# EAGLE board kwpa_ldmos2 (EAGLE 7.7.0)
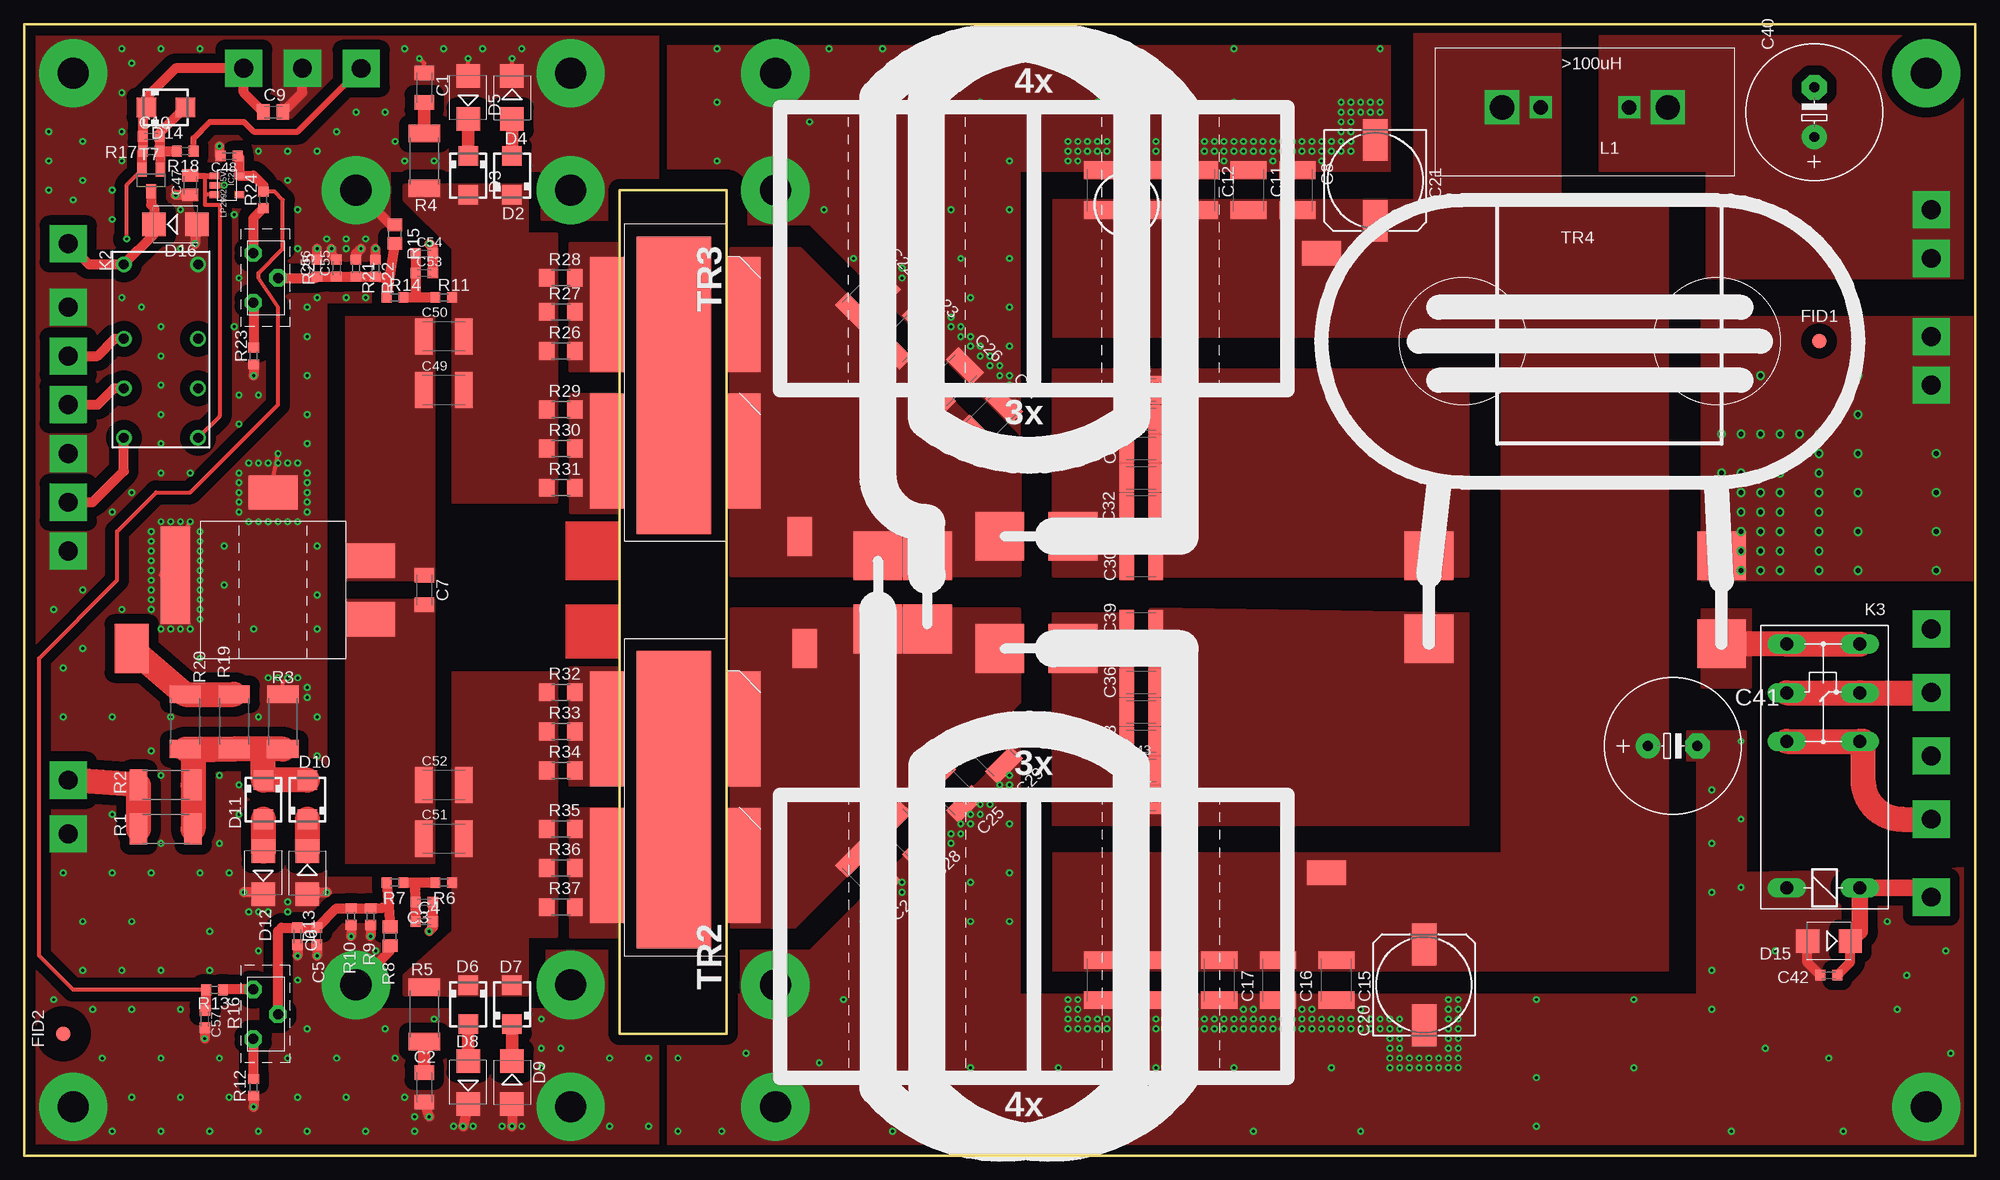
[diagram p0: board, top side]
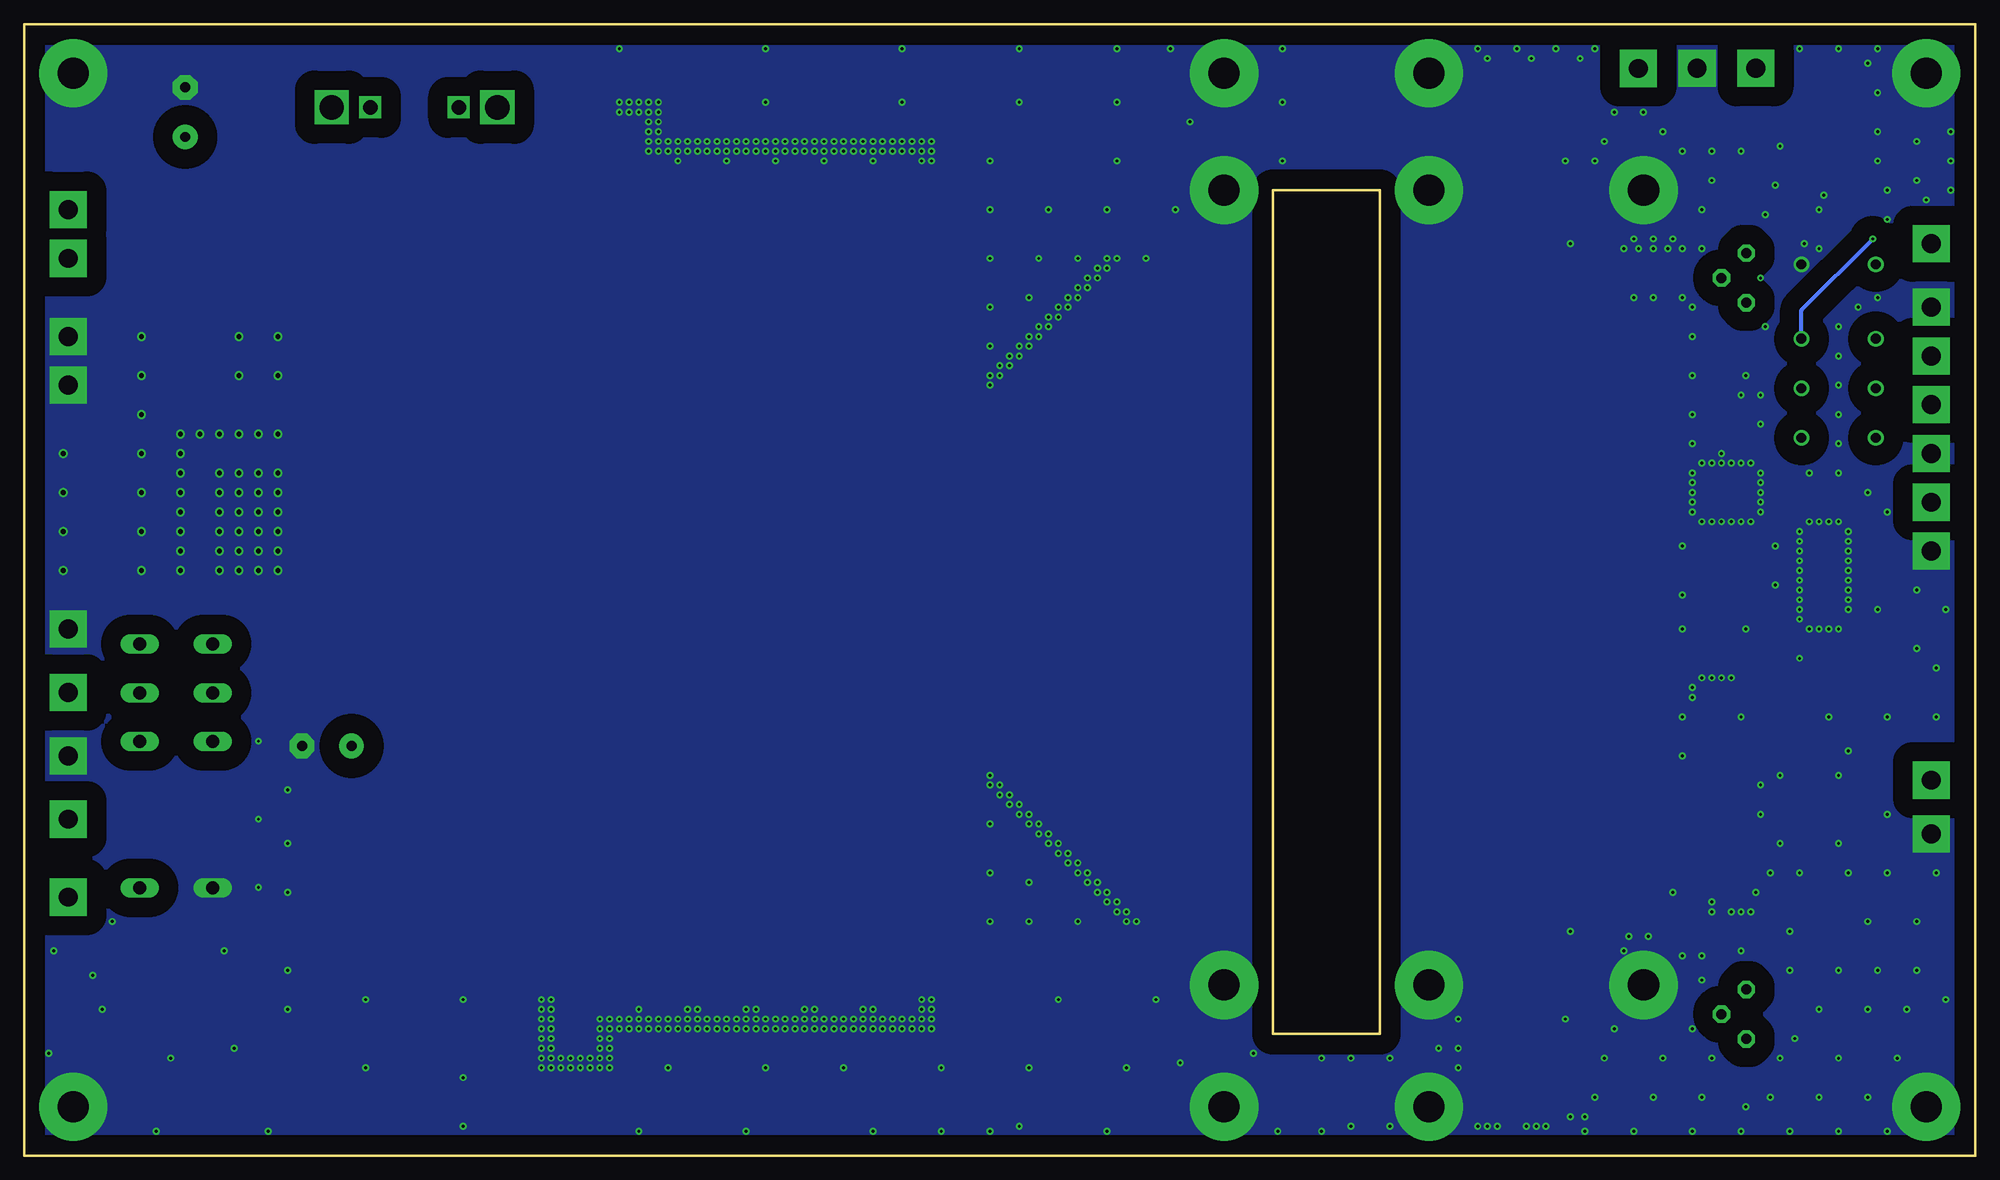
[diagram p1: board, bottom side, seen from below]

Size 200 x 116 mm. Coordinates in mm from the lower left corner, seen from the top.
Outline: 61,99 61,12.5 72,12.5 72,99 61,99
Outline: 0,0 200,0 200,116 0,116 0,0
Copper layers (1*16): Top 0.035mm / dielectric 1.5mm / Bottom 0.035mm
Design rules "default *": minimum track width 10mil, minimum drill 0.3mm, track to track 8mil, track to pad 8mil, pad to pad 8mil, via to via 8mil, smd to smd 0mil, copper to edge 2mil, drill to drill 8mil, minimum pad ring 10mil, minimum via ring 8mil, stop-mask expansion 4mil, vias tented up to drill 0.51mm, thermal gap 10mil

## Footprints (pad centres in the part's own frame; a part is rotated, then mirrored left to right if it is on the bottom)
C1206K = smd 1.5 x 2: 1 -1.5,0; 2 1.5,0
C0603K = smd 1.05 x 1.08: 1 -0.875,0; 2 0.875,0
C1812K = smd 1.8 x 3.7: 1 -2.05,0; 2 2.05,0
C0805K = smd 1.3 x 1.6: 1 -1,0; 2 1,0
153CLV-1014 = smd 4.3 x 2.5: + 4.15,0; - -4.15,0
C1210K = smd 1.5 x 2.9: 1 -1.5,0; 2 1.5,0
E5-13 = drill 1.016 pad 2.54: + -2.54,0 | drill 1.016 pad 2.54 octagon: - 2.54,0
SMA = smd 2 x 2: A 2,0; C -2,0
SMB = smd 2.4 x 2.4: A 2.2,0; C -2.2,0
FIDUCIAL = smd 1.5 x 1.5: P$1 0,0
HOLE32 = drill 3.2 pad 7: P$1 0,0
SOT23-5 = smd 0.686 x 0.991: 1 -0.953,0; 2 0,0; 3 0.953,0; 4 0.953,2.54; 5 -0.953,2.54
THICKPIN = drill 1.93 pad 3.81 square: 1 0,0
FINDER-30.22 = drill 1 pad 1.6: 11 -1.27,-3.81; 12 3.81,-3.81; 14 8.89,-3.81; 21 -1.27,3.81; 22 3.81,3.81; 24 8.89,3.81; A1 -8.89,-3.81; A2 -8.89,3.81
G2RE = drill 1.321 long: 1 -2.54,-3.683; 2 -2.54,3.81; O0 12.471,-3.683; O1 12.471,3.81; P0 17.45,-3.683; P1 17.45,3.81; S0 22.454,-3.683; S1 22.454,3.81
KERN90_STEHEND_2PIN = drill 1.5 square: P$1 -4.54,0; P$2 4.54,0
R2512 = smd 1.8 x 3.2: 1 -2.8,0; 2 2.8,0
R0603 = smd 1 x 1.1: 1 -0.85,0; 2 0.85,0
R0805 = smd 1.3 x 1.5: 1 -0.95,0; 2 0.95,0
MINIPOTI = drill 1.016 pad 1.778 octagon: 1 -2.54,-2.54; 2 2.54,-2.54; 3 0,0
R1206 = smd 1.6 x 1.803: 1 -1.422,0; 2 1.422,0
BLF188 = smd 11.8 x 3.5: 1 9.25,12.25; 2 23.25,12.25; 3 9.25,-1.75; 4 23.25,-1.75 | smd 30.48 x 7.62: PAD 16.51,5.08
SMDPAD2,5X4 = smd 4 x 2.5: P$1 0,0
SOT23 = smd 1 x 1.4: 1 -0.95,-1.1; 2 0.95,-1.1; 3 0,1.1
KW-INPUT_LAIRD_28B0562-100 = smd 10 x 3: COM 8.5,17.5 | smd 3.5 x 5: GND 17,7.5; OUT1 4,-2.5; OUT2 10,-2.5 | smd 5 x 3.5: IN 1,22
DOPPELRINGKERN = smd 5 x 5: P1 10,53.5; P2 22.5,44; S1 10,46; S2 30,44
DOPPELRINGKERN_REV = smd 5 x 5: P1 15.08,-53.5; P2 22.5,-44; S1 15.08,-46; S2 30,-44
DOPPELLMANTEL_STEHEND = smd 5 x 5: P1 45.5,40.5; P2 45,10.5; S1 36.5,40.5; S2 36.5,10.5

## Placement (x,y rotation side)
C1  10n/450V  [C1206K]  41,109.5 270 top
C2  10n/450V  [C1206K]  41,7 270 top
C3  1u  [C0603K]  41,26 0 top
C4  100n  [C0603K]  41,24 0 top
C5  1u  [C0603K]  30,22.5 270 top
C6  10n  [C0603K]  28,22.5 270 top
C7  opt.  [C1206K]  41,58 270 top
C8  10n  [C1812K]  130.5,99 90 top
C9  10u/25  [C0805K]  25.5,107 0 top
C10  10n  [C0603K]  13,104.5 0 top
C11  10n  [C1812K]  125.5,99 90 top
C12  100n  [C1812K]  120.5,99 90 top
C13  100n  [C1812K]  115.5,99 90 top
C14  1u  [C1812K]  110.5,99 90 top
C15  10n  [C1812K]  134.5,18 90 top
C16  10n  [C1812K]  128.5,18 90 top
C17  100n  [C1812K]  122.5,18 90 top
C18  100n  [C1812K]  116.5,18 90 top
C19  1u  [C1812K]  110.5,18 90 top
C20  100u/63  [153CLV-1014]  143.5,17.5 90 top
C21  100u/63  [153CLV-1014]  138.5,100 270 top
C22  120p  [C1812K]  86.5,88 225 top
C23  120p  [C1812K]  90.5,84 225 top
C24  120p  [C1812K]  86.5,29 135 top
C25  120p  [C1812K]  95,37.5 135 top
C26  120p  [C1812K]  95,79.5 225 top
C27  120p  [C1812K]  99,75.5 225 top
C28  120p  [C1812K]  90.5,33 135 top
C29  120p  [C1812K]  99,41.5 135 top
C30  10n  [C1210K]  114.5,60.5 0 top
C31  10n  [C1210K]  114.5,63.5 0 top
C32  10n  [C1210K]  114.5,66.5 0 top
C33  10n  [C1210K]  114.5,69.5 0 top
C34  10n  [C1210K]  114.5,72.5 0 top
C35  10n  [C1210K]  114.5,51.5 0 top
C36  10n  [C1210K]  114.5,48.5 0 top
C37  10n  [C1210K]  114.5,45.5 0 top
C38  10n  [C1210K]  114.5,42.5 0 top
C39  10n  [C1210K]  114.5,54.5 0 top
C40  470uF/63V  [E5-13]  183.5,107 90 top
C41  470uF/63V  [E5-13]  169,42 0 top
C42  100n  [C0603K]  185,18.5 0 top
C43  10n  [C1210K]  114.5,39.5 0 top
C44  10n  [C1210K]  114.5,36.5 0 top
C45  10n  [C1210K]  114.5,75.5 0 top
C46  10n  [C1210K]  114.5,78.5 0 top
C47  10u  [C0805K]  17,99.5 90 top
C48  10u  [C0603K]  21,102.5 180 top
C49  100n  [C1812K]  43,78.5 0 top
C50  100n  [C1812K]  43,84 0 top
C51  100n  [C1812K]  43,32.5 0 top
C52  100n  [C1812K]  43,38 0 top
C53  1u  [C0603K]  41,90.5 0 top
C54  100n  [C0603K]  41,92.5 0 top
C55  1u  [C0603K]  32,91 90 top
C56  10n  [C0603K]  30,91 90 top
C57  1u  [C0603K]  18.5,14 270 top
D2  8,2V  [SMA]  50,100.5 90 top
D3  4,7V  [SMA]  45.5,100.5 270 top
D4  DIODE SMB  [SMB]  50,108.5 270 top
D5  DIODE SMB  [SMB]  45.5,108.5 90 top
D6  8,2V  [SMA]  45.5,15.5 270 top
D7  4,7V  [SMA]  50,15.5 90 top
D8  DIODE SMB  [SMB]  45.5,7.5 90 top
D9  DIODE SMB  [SMB]  50,7.5 270 top
D10  SMBJ15A  [SMA]  29,36.5 90 top
D11  SMBJ15A  [SMA]  24.5,36.5 270 top
D12  DIODE SMB  [SMB]  24.5,29 90 top
D13  DIODE SMB  [SMB]  29,29 270 top
D14  6,2V/1W  [SMA]  14.5,107.5 0 top
D15  DIODE SMB  [SMB]  185,22 180 top
D16  DIODE SMB  [SMB]  15.5,95.5 0 top
FID1  FIDUCIAL  [FIDUCIAL]  184,83.5 0 top
FID2  FIDUCIAL  [FIDUCIAL]  4,12.5 0 top
H1  HOLE_32  [HOLE32]  5,111 0 top
H2  HOLE_32  [HOLE32]  5,5 0 top
H3  HOLE_32  [HOLE32]  195,111 0 top
H4  HOLE_32  [HOLE32]  195,5 0 top
H5  HOLE_32  [HOLE32]  77,99 0 top
H6  HOLE_32  [HOLE32]  56,5 90 top
H7  HOLE_32  [HOLE32]  56,111 90 top
H8  HOLE_32  [HOLE32]  34,17.5 90 top
H9  HOLE_32  [HOLE32]  56,17.5 90 top
H10  HOLE_32  [HOLE32]  77,17.5 90 top
H11  HOLE_32  [HOLE32]  34,99 90 top
H12  HOLE_32  [HOLE32]  56,99 90 top
H13  HOLE_32  [HOLE32]  77,111 0 top
H14  HOLE_32  [HOLE32]  77,5 0 top
IC2  LP2992 - 5V  [SOT23-5]  19.5,99.5 270 top
JP1  RF_IN  [THICKPIN]  4.5,82 0 top
JP2  GND  [THICKPIN]  4.5,87 0 top
JP3  GND  [THICKPIN]  195.5,41 90 top
JP4  RXBYP-2  [THICKPIN]  195.5,34.5 90 top
JP5  +12..+14V  [THICKPIN]  22.5,111.5 90 top
JP7  RX_BYP1  [THICKPIN]  4.5,77 0 top
JP8  GND  [THICKPIN]  4.5,72 0 top
JP9  PTT  [THICKPIN]  34.52,111.48 90 top
JP10  GND  [THICKPIN]  28.5,111.5 90 top
JP11  RF-OUT  [THICKPIN]  195.5,47.5 90 top
JP12  GND  [THICKPIN]  195.5,54 90 top
JP13  +50V  [THICKPIN]  195.5,97 0 top
JP14  GND  [THICKPIN]  195.5,84 0 top
JP15  GND  [THICKPIN]  195.5,79 0 top
JP16  +50V  [THICKPIN]  195.5,92 0 top
JP17  RELAIS  [THICKPIN]  4.5,93.5 0 top
JP18  RELAIS  [THICKPIN]  195.5,26.5 0 top
JP19  TO_ATT  [THICKPIN]  4.5,67 0 top
JP20  GND  [THICKPIN]  4.5,62 0 top
JP21  FROM_ATT  [THICKPIN]  4.5,38.5 0 top
JP22  GND  [THICKPIN]  4.5,33 0 top
K2  FINDER-30.22  [FINDER-30.22]  14,82.5 270 top
K3  G5RL-1E-HR-12V  [G2RE]  184.5,30 90 top
L1  >100uH  [KERN90_STEHEND_2PIN]  160,107.5 180 top
R1  22/2W  [R2512]  14.5,33.5 0 top
R2  22/2W  [R2512]  14.5,38 0 top
R3  100/2W  [R2512]  26.5,44.5 270 top
R4  10/2W  [R2512]  41,102 90 top
R5  10/2W  [R2512]  41,14.5 90 top
R6  1k  [R0603]  43,28 0 top
R7  470  [R0603]  38,28 0 top
R8  NTC0805J5K0  [R0805]  37.5,22.5 90 top
R9  560  [R0603]  35.5,24.5 90 top
R10  5k6  [R0603]  33.5,24.5 90 top
R11  1k  [R0603]  43,88 0 top
R12  47  [R0603]  23.5,7 90 top
R13  270  [R0603]  19.5,17 180 top
R14  470  [R0603]  38,88 0 top
R15  NTC0805J5K0  [R0805]  38,94.5 270 top
R16  250  [MINIPOTI]  26,14.5 270 top
R17  10k  [R0603]  13,103 0 top
R18  10k  [R0603]  16.5,103 180 top
R19  22/2W  [R2512]  21.5,44.5 90 top
R20  22/2W  [R2512]  16.5,44.5 90 top
R21  560  [R0603]  34,91 270 top
R22  5k6  [R0603]  36,91 270 top
R23  47  [R0603]  23.5,82 90 top
R24  270  [R0603]  24.5,98 90 top
R25  250  [MINIPOTI]  26,90 270 top
R26  10  [R1206]  55,82.5 0 top
R27  10  [R1206]  55,86.5 0 top
R28  10  [R1206]  55,90 0 top
R29  10  [R1206]  55,76.5 0 top
R30  10  [R1206]  55,72.5 0 top
R31  10  [R1206]  55,68.5 0 top
R32  10  [R1206]  55,47.5 0 top
R33  10  [R1206]  55,43.5 0 top
R34  10  [R1206]  55,39.5 0 top
R35  10  [R1206]  55,33.5 0 top
R36  10  [R1206]  55,29.5 0 top
R37  10  [R1206]  55,25.5 0 top
T1  BLF188  [BLF188]  61.5,53 270 top
T1P3  [SMDPAD2,5X4]  133,92.5 180 top
T1P4  [SMDPAD2,5X4]  79.5,63.5 90 top
T1S3  [SMDPAD2,5X4]  80,52 90 top
T1S4  [SMDPAD2,5X4]  133.5,29 0 top
T2  BLF188  [BLF188]  61.5,95.5 270 top
T7  IRLML6401  [SOT23]  13,100 180 top
TR1  4:1 Laird 28B0562-100  [KW-INPUT_LAIRD_28B0562-100]  33,51 90 top
TR2  [DOPPELRINGKERN]  77.5,8 0 top
TR3  [DOPPELRINGKERN_REV]  77.5,107.5 0 top
TR4  [DOPPELLMANTEL_STEHEND]  133.5,98 270 top

## Library data of the parts
C1-C57 R1-R15 R17-R24 R26-R37 = rcl
D2 D3 D6 D7 D10 D11 D14 FID1 FID2 H1-H14 IC2 JP1-JP5 JP7-JP22 R16 R25 T1P3 T1P4 T1S3 T1S4 = km
D4 D5 D8 D9 D12 D13 D15 D16 = diode
K2 K3 = relay; OC_FARNELL: unknown; OC_NEWARK: unknown
L1 T1 T2 TR1-TR4 = km_HF
T7 = transistor-small-signal

## Nets
ATTM: D10.A D11.C R1.2 R2.2 R3.2 R19.1 R20.1
BYP: IC2.4
BYP1: JP7.1 K2.12
DD1: C49.2 C50.2 D2.C D3.A R4.1 R11.2 R26.1 R27.1 R28.1 R29.1 R30.1 R31.1
DD2: C51.2 C52.2 D6.C D7.A R5.2 R6.2 R32.1 R33.1 R34.1 R35.1 R36.1 R37.1
DI1: C7.1 C49.1 C50.1 TR1.OUT2
DI2: C7.2 C51.1 C52.1 TR1.OUT1
DRAIN1: C22.2 C23.2 C26.2 C27.2 T1P4.P$1 T2.1 T2.2 TR2.P1 TR3.P2 TR3.S1
DRAIN2: C24.2 C25.2 C28.2 C29.2 T1.1 T1.2 T1S3.P$1 TR2.P2 TR2.S1 TR3.P1
G1: R26.2 R27.2 R28.2 T2.3
G2: R29.2 R30.2 R31.2 T2.4
G3: R32.2 R33.2 R34.2 T1.3
G4: R35.2 R36.2 R37.2 T1.4
GND: C1.1 C2.2 C3.2 C4.2 C5.2 C6.2 C8.2 C9.2 C11.2 C12.2 C13.2 C14.2 C15.1 C16.1 C17.1 C18.1 C19.1 C20.- C21.- C22.1 C23.1 C24.1 C25.1 C26.1 C27.1 C28.1 C29.1 C40.- C41.- C42.1 C47.1 C48.2 C53.2 C54.2 C55.2 C56.2 C57.2 D4.C D5.A D8.C D9.A D12.C D13.A D15.A D16.A H1.P$1 H2.P$1 H3.P$1 H4.P$1 H5.P$1 H6.P$1 H7.P$1 H8.P$1 H9.P$1 H10.P$1 H11.P$1 H12.P$1 H13.P$1 H14.P$1 IC2.2 JP2.1 JP3.1 JP8.1 JP10.1 JP12.1 JP14.1 JP15.1 JP20.1 JP22.1 K2.A2 K3.2 R3.1 R8.1 R9.1 R10.1 R12.1 R15.1 R21.1 R22.1 R23.1 TR1.COM TR1.GND TR4.S1
N$1: JP21.1 R1.1 R2.1
N$2: C47.2 IC2.1 IC2.3 K2.24
N$3: D10.C D13.C
N$4: JP11.1 K3.P0 K3.P1
N$5: C1.2 R4.2
N$6: C2.1 R5.1
N$7: JP19.1 K2.14
N$8: C3.1 C4.1 R6.1 R7.2
N$9: C5.1 C6.1 R7.1 R8.2 R9.2 R10.2 R16.3
N$10: T1.PAD
N$12: R12.2 R16.2
N$13: R13.1 R16.1
N$14: C48.1 C57.1 IC2.5 R13.2 R24.2
N$15: D3.C D5.C
N$16: D2.A D4.A
N$17: C53.1 C54.1 R11.1 R14.2
N$18: D7.C D9.C
N$19: D6.A D8.A
N$20: D11.A D12.A
N$21: C55.1 C56.1 R14.1 R15.2 R21.2 R22.2 R25.3
N$22: R23.2 R25.2
N$23: R24.1 R25.1
N$26: T2.PAD
N$28: C10.2 D14.A R17.2 R18.2 T7.1
N$29: JP4.1 K3.O0 K3.O1
N$33: JP9.1 R18.1
N$34: R19.2 R20.2 TR1.IN
OUTP1: C30.1 C31.1 C32.1 C33.1 C34.1 C45.1 C46.1 TR3.S2
OUTP2: C35.1 C36.1 C37.1 C38.1 C39.1 C43.1 C44.1 TR2.S2
OUTR1: K3.S0 K3.S1 TR4.P1
OUTS1: C30.2 C31.2 C32.2 C33.2 C34.2 C45.2 C46.2 TR4.S2
OUTS2: C35.2 C36.2 C37.2 C38.2 C39.2 C43.2 C44.2 TR4.P2
RELAIS: C42.2 D15.C JP18.1 K3.1
RELAISOUT: D16.C JP17.1 K2.A1 T7.3
RFIN: JP1.1 K2.11
U12: C9.1 C10.1 D14.C JP5.1 K2.21 R17.1 T7.2
UIN: C40.+ JP13.1 JP16.1 L1.P$1
UVERS: C8.1 C11.1 C12.1 C13.1 C14.1 C15.2 C16.2 C17.2 C18.2 C19.2 C20.+ C21.+ C41.+ L1.P$2 T1P3.P$1 T1S4.P$1

## Tracks (layer width: path | path; a pad name or v marks a point on that pad's centre or on a via)
ATTM
  Top 2.54: R3.2 24.5,41.7 | 24.5,41.7 R19.1 | R20.1 R19.1 | R19.1 17.5,41.5 17.3,41.5 R2.2 R1.2 | D10.A D11.C 24.5,41.7
BYP1
  Top 1.016: JP7.1 7.5,77 9.19,78.69 K2.12
DD1
  pour Top (no thermals): 54.5,67 44,67 44,93 39,98 39,99.5 51.5,99.5 51.5,94.5 54.5,94.5
DD2
  pour Top (no thermals): 54.5,49.5 54.5,22.5 51.5,22.5 51.5,16.5 39,16.5 39,18.5 44,23 44,49.5
DI1
  pour Top (no thermals): 42,59 42,86 37,86 33,86 33,59
DI2
  pour Top (no thermals): 42,57 33,57 33,34 33,30 42,30
DRAIN1
  pour Top (no thermals): 72.5,93 79.5,93 102,70.5 102,59.5 72.5,59.5
DRAIN2
  pour Top (no thermals): 72.5,23.5 79,23.5 102,46.5 102,56 72.5,56
G1
  pour Top (no thermals): 61,80.5 56,80.5 56,93.5 61,93.5
G2
  pour Top (no thermals): 61,78 56,78 56,66 61,66
G3
  pour Top (no thermals): 61,38 56,38 56,50 61,50
G4
  pour Top (no thermals): 61,35.5 56,35.5 56,22.5 61,22.5
GND  (via drill 0.3, 0.5)
  Top 0.406: TR1.GND 25.5,69.5 v26,72 | C1.1 41,112 v40.5,112.5 | D5.A v45.5,112.5 | D4.C v50,112.5 | TR1.COM 14,59.5 v17,65 | R3.1 26.5,48.5 v27,49
  Top 0.61: IC2.2 v20.5,99.5
  Top 1.016: C42.1 182.8,19.82 D15.A | C9.2 28.5,109 JP10.1 | C48.2 20,102.62 v20,103.5 | C47.1 v15.5,98.5 | D16.A 17.5,95.3 v17.5,93.5 | R23.1 v23.5,80 | C56.2 v30,93 | C55.2 31.5,92.38 v31.5,93 | R21.1 34,92.5 v34.5,93 | R22.1 v36,93 | R15.1 37.55,95.45 H11.P$1 | v41.5,93.5 41.88,93.12 C54.2 C53.2 | C3.2 C4.2 41.88,23.38 v41.5,23 | R9.1 v35.5,22.5 | R8.1 37.5,21 H8.P$1 | R10.1 v33.5,22.5 | C5.2 v30,20.5 | C6.2 v28,20.5 | R12.1 v23.5,5 | D12.C 24.3,27 v22.5,27 | D13.A 29.2,27 v31,27 | C2.2 v41.5,4 | D8.C v45,3 | D9.A v50,3 | C57.2 v18.5,12
  other vias: 101,92 88,92 89,91 90,90 91,89 92,88 93,87 94,86 95,85 96,84 97,83 98,82 99,81 100,80 101,79 101,80 99,82 98,83 94,87 93,88 90,91 89,92 85,92 96,92 101,87 97,88 101,83 92,92 91,90 92,89 95,86 96,85 97,84 100,81 101,24 101,39 100,38 99,37 98,36 97,35 96,34 95,33 94,32 93,31 92,30 91,29 90,28 89,27 88,26 87,25 86,24 87,24 88,25 89,26 90,27 91,28 92,29 93,30 94,31 95,32 96,33 97,34 98,35 99,36 100,37 101,38 101,34 101,29 97,24 92,24 97,28 108,103 109,103 110,103 111,103 112,103 113,103 114,103 115,103 116,103 117,103 118,103 119,103 120,103 121,103 122,103 123,103 124,103 125,103 126,103 127,103 128,103 129,103 130,103 131,103 132,103 133,103 134,103 135,103 136,103 136,104 136,105 136,106 136,107 137,107 138,107 139,107 108,102 113,102 118,102 123,102 128,102 133,102 107,102 107,103 107,104 108,104 109,104 110,104 111,104 112,104 113,104 114,104 115,104 116,104 117,104 118,104 119,104 120,104 121,104 122,104 123,104 124,104 125,104 126,104 127,104 128,104 129,104 130,104 131,104 132,104 133,104 134,104 135,104 135,105 135,106 135,107 135,108 136,108 137,108 138,108 139,108 139,113.5 124,113.5 110,113.5 98,113.5 88,113.5 82.5,113.5 71,113.5 71,108 71,102 82,97 89,97 95,97 101,97 101,102 80.5,106 88,108 98,108 110,108 124,108 88,102 174,74 176,74 178,74 180,74 182,74 184,74 184,72 184,70 184,68 184,66 184,64 184,62 184,60 174,84 178,84 174,80 178,80 188,84 188,80 188,76 188,72 188,68 188,64 188,60 196,60 196,64 196,68 196,72 174,70 174,66 174,62 176,60 180,60 180,62 180,66 180,70 178,70 176,70 176,66 178,66 178,62 174,68 176,68 178,68 180,68 180,64 178,64 176,64 174,64 174,60 176,62 178,60 108,16 108,15 108,14 109,14 107,16 107,15 107,14 107,13 108,13 109,13 110,14 111,14 112,14 113,14 114,14 115,14 116,14 117,14 118,14 119,14 120,14 121,14 122,14 123,14 124,14 125,14 126,14 127,14 128,14 129,14 130,14 131,14 132,14 133,14 134,14 135,14 136,14 137,14 138,14 139,14 140,14 141,14 141,13 141,12 141,11 141,10 142,10 143,10 144,10 145,10 146,10 146,11 146,12 146,13 146,14 146,15 146,16 137,15 132,15 131,15 126,15 125,15 120,15 119,15 114,15 113,15 110,13 111,13 112,13 113,13 114,13 115,13 116,13 117,13 118,13 119,13 120,13 121,13 122,13 123,13 124,13 125,13 126,13 127,13 128,13 129,13 130,13 131,13 132,13 133,13 134,13 135,13 136,13 137,13 138,13 139,13 140,13 140,12 140,11 140,10 140,9 141,9 142,9 143,9 144,9 145,9 146,9 147,9 147,10 147,11 147,12 147,13 147,14 147,15 147,16 67,10 67,2.5 71.5,2.5 89,2.5 98,3 101,2.5 106,2.5 113,2.5 126,2.5 137,2.5 84,16 94,16 74,10.5 81.5,9.5 87,9 97,9 106,9 116,9 124,9 134,9 155,16 165,16 173,15 173,19 173,27 197,21 197.5,10.5 186.5,2.5 175,2.5 155,3 155,8 165,9 185,10 192,15 191,24 33,93 10,113.5 14,113.5 18,113.5 39,113.5 43,113.5 47,113.5 51,113.5 11,112 10,109 2.5,105 2.5,102 2.5,99 5,98 9,96 9,99 10,102 10,105 6,104 6,100 24,103 27,103 30,103 32,105 34,107 37,107 38,104 39,102 42,102 27,100 28,97 28,93 31,94 33,94 35,94 16,97 16,93 10,88 12,87 14,85 14,82 14,79 14,76 14,73 14,70 11,68 9,66 3,56 6,58 22,75 22,78 24,78 17,70 35,88 33,88 30,88 29,87 29,84 29,80 29,76 29,73 29,70 29,69 29,68 29,67 29,66 28,65 27,65 26,65 25,65 24,65 23,65 22,66 22,67 22,68 22,69 22,70 23,71 24,71 25,71 26,71 27,71 28,71 16,65 15,65 14,65 13,64 13,63 13,62 13,61 13,60 13,59 13,58 13,57 13,56 14,54 15,54 16,54 17,54 18,55 18,56 18,57 18,58 18,59 18,60 18,61 18,62 18,63 18,64 25,49 26,49 28,49 30,41 30,45 29,47 29,48 30,57.5 23.5,54 18,51 24,45 15,45 4,45 9,45 6,52 10,56 13,41.5 14,32 14,39 20,39 22,38 22,35 20,32 21,29 18,29 13,29 9,29 4,29 9,35 4,50 3,16 7,15 11,15 16,15 8,10 14,10 20,10 11,6 16,6 21,6 9,2.5 14,2.5 19,2.5 24,2.5 29,2.5 35,2.5 40,2.5 28,6 33,6 39,6 27,10 32,10 38,10 29,13 37,13 42,14 28,18 36,21 6,19 10,19 14,19 19,19 24,21 23,25 24,25 25,25 27,26 27,25 19,23 6,24 11,24 64,3 64,10 60,10 60,3 53,14 53,11 53,9 55,11 40,4 44,3 46,3 49,3 51,3 173,32 173,37.5 176,42.5 176,34.5 176,27.5 179.5,21 193,18.5 178.5,11 21.5,96.5 22,90 21.5,85 30,54 30,62.5 20.5,62.5 20.5,58.5
  pour Bottom (isolate 2, no thermals): -5.5,116.75 200.25,116.75 199.75,-0.25 -6,-0.25
  pour Top (isolate 1, no thermals): 171.5,16.5 171.5,40.5 170.5,40.5 170.5,43.5 176.5,43.5 176.5,29 200.5,29.5 200.5,0 66,0 66,16.5 73.5,16.5 73.5,21 80.5,21 102,42.5 102,16.5
  pour Top (isolate 2, no thermals): 140,101 140,117 66,117 66,100.5 73.5,100.5 73.5,95.5 80.5,95.5 102,74 102,101
  pour Top (no thermals): 200,86 200,59 172,59 172,86
  pour Top (isolate 1.016, no thermals): -0.5,116 -0.5,0 65,0 65,21 53.5,21 53.5,15 36.5,15 36.5,28.5 31,28.5 31,87.5 37.5,87.5 37.5,101 53,101 53,96 65,96 65,116
N$1
  Top 2.54: R1.1 R2.1 JP21.1
N$2
  Top 0.203: 18.5,100.46 18.51,100.47
  Top 0.406: 18.5,100.46 18.5,98.5 | 18.5,98.5 18.5,97.5 20,97.5 20,75.8 K2.24 | IC2.3 18.55,98.55 18.5,98.5
  Top 0.61: C47.2 18.51,100.47 IC2.1
N$3
  Top 2.54: D10.C D13.C
N$4
  Top 2.54: K3.P1 K3.P0 195.5,47.45 JP11.1
N$5
  Top 1.27: R4.2 C1.2
N$6
  Top 1.27: R5.1 C2.1
N$7
  Top 1.016: JP19.1 7,67 10.19,70.19 K2.14
N$8
  Top 1.016: C4.1 C3.1 arc7 40,28 | R7.2 40,28 | 40,28 R6.1
N$9
  Top 1.016: R16.3 26,23 26.38,23.38 C6.1 C5.1 31.98,25.35 R10.2 R9.2 arc11 37.34,25.53 | R7.1 37.34,25.53 | 37.34,25.53 R8.2
N$12
  Top 1.016: R12.2 23.5,11.92 R16.2
N$13
  Top 1.016: R16.1 20.39,17.04 R13.1
N$14
  Top 0.406: R13.2 5,17 1.5,20.5 1.5,51 9.5,59 9.5,64 13.5,68 17,68 26,77 26,87 24,90 24,90.5 26.5,93 26.5,98 25.65,98.85 R24.2
  Top 1.016: C48.1 22.04,102.33 IC2.5 22.09,100.5 23.5,100.5 24.5,99.5 R24.2 | C57.1 18.65,15.03 R13.2
N$15
  Top 1.27: D3.C D5.C
N$16
  Top 1.27: D2.A D4.A
N$17
  Top 1.016: C54.1 C53.1 40.12,88.12 40,88 | R11.1 40,88 | 40,88 R14.2
N$18
  Top 1.27: D7.C D9.C
N$19
  Top 1.27: D6.A D8.A
N$20
  Top 2.54: D11.A D12.A
N$21
  Top 1.016: R25.3 29.88,90 C56.1 C55.1 33.98,90.12 R21.2 R22.2 37.45,89.93 | R14.1 37.45,89.93 | 37.45,89.93 R15.2
N$22
  Top 1.016: R25.2 23.5,87.42 R23.2
N$23
  Top 1.016: R24.1 23.46,96.11 R25.1
N$28
  Top 1.016: D14.A 13.88,104.88 C10.2 13.85,104.47 R17.2 | R17.2 13.95,102.9 T7.1 | R17.2 R18.2
N$29
  Top 2.54: K3.O1 K3.O0 188.5,42.47 188.5,38.5 arc90 192.5,34.5 JP4.1
N$33
  Top 0.61: R18.1 17.35,104.35 19,106 22.5,106 23.5,105 28.04,105 JP9.1
N$34
  Top 2.54: TR1.IN R20.2 R19.2
OUTP1
  pour Top (no thermals): 105.5,59.5 113.5,59.5 113.5,80.5 105.5,80.5
OUTP2
  pour Top (no thermals): 113.5,55.5 105.5,55.5 105.5,34 113.5,34
OUTR1
  Top 2.54: TR4.P1 180.69,52.5 K3.S1 K3.S0
  pour Top (no thermals): 172,56 172,48 177,48 177,56
OUTS1
  pour Top (no thermals): 115.5,59.5 148,59.5 148,80.5 115.5,80.5
OUTS2
  pour Top (no thermals): 115.5,56 115.5,34 148,34 148,55.5
RELAIS
  Top 1.016: C42.2 187.2,19.82 D15.C
  Top 1.676: JP18.1 194.54,27.46 K3.1 188.18,22.98 D15.C
RELAISOUT
  Top 1.016: T7.3 13,97.5 13.3,97.2 D16.C 13.3,94.5 K2.A1 6.61,91.39 JP17.1
RFIN
  Top 1.016: JP1.1 7.5,82 9.27,83.77 K2.11
U12  (via drill 0.3)
  Top 0.406: v10.5,94 10.5,99.55 T7.2
  Top 1.016: C9.1 22.5,109 JP5.1 15.5,111.5 12.5,108.5 D14.C 12.12,107.12 C10.1 12.15,104.47 R17.1 12.05,102.9 T7.2
  Bottom 0.406: K2.21 17.81,86.69 v10.5,94
UIN  (via drill 2.5)
  other vias: 168.5,107.5
  pour Top (isolate 1, no thermals): 199.5,116 199.5,90 172.5,90 172.5,101 161.5,101 161.5,116
UVERS  (via drill 2.5)
  other vias: 151.5,107.5
  pour Top (no thermals): 105.5,31 151.5,31 151.5,84 105.5,84 105.5,98 142.5,98 142.5,115 157.5,115 157.5,98 168.5,98 168.5,19 105.5,19
(copper drawn outside any net)
  shapes: Top area x2

## Text on the board
Document: +12V | GND | PTT | Ub-Choke | GATE / Protection | UB / INPUT | Tsense | RELAIS | +Ub(30-50V) | GND | GATE-1 | DRAIN-1 | RF_IN | Iq1/2 | GND | BYP1 | GROUND | GND | GATE-2 | DRAIN-2 | DRIVE-1 | TOATT | GND | INPUT / TRANS- / FORMER | use for / SINGLE / DEVICE | GND | RFOUT | Input / ATT | GND | GATE-3 | DRAIN-3 | BYP2 | FROMATT | DRIVE-2 | GND | RELAIS | Input Prot. | DRAIN-4 | GATE-4 | KWPA 1.3 / DJ0ABR | Tsense | GATE / Protection | Iq3/4